# EAGLE board remote_node_schematic (EAGLE 8.3.1)

No outline drawn. Coordinates in mm, seen from the top.
Copper layers (1*16): Top 0.035mm / dielectric 1.5mm / Bottom 0.035mm
Design rules "default": minimum track width 6mil, minimum drill 0.35mm, track to track 6mil, track to pad 6mil, pad to pad 6mil, via to via 6mil, smd to smd 6mil, copper to edge 40mil, drill to drill 6mil, minimum pad ring 10mil, minimum via ring 8mil, stop-mask expansion 4mil, vias tented up to drill 0mil, thermal gap 10mil

## Footprints (pad centres in the part's own frame; a part is rotated, then mirrored left to right if it is on the bottom)
085CS_1AR = smd 2.9 x 2.5: + 3.25,0; - -3.25,0
0207/10 = drill 0.813 octagon: 1 -5.08,0; 2 5.08,0
SOP65P490X110-8N = smd 1.499 x 0.432: 1 -2.184,0.965; 2 -2.184,0.33; 3 -2.184,-0.33; 4 -2.184,-0.965; 5 2.184,-0.965; 6 2.184,-0.33; 7 2.184,0.33; 8 2.184,0.965

## Placement (x,y rotation side)
C1  10u  [085CS_1AR]  -2.54,-401.32 0 top
C2  10u  [085CS_1AR]  -2.54,-410.21 0 top
R1  82k  [0207/10]  0,-340.36 0 top
R2  10k  [0207/10]  0,-354.33 0 top
U1  ADP3333ARMZ-3.3-R7  [SOP65P490X110-8N]  -6.35,-379.73 0 top
U2  ADP3333ARMZ-3.3-R7  [SOP65P490X110-8N]  -6.35,-391.16 0 top

## Library data of the parts
C1 C2 = rcl
R1 R2 = resistor
U1 = ADP3333ARMZ-3.3-R7; AVAILABILITY: Good; DESCRIPTION: PMIC - LDO voltage regulator Analog Devices ADP3333ARMZ-3.3-R7 Positive, fixed MSOP 8; MF: Analog Devices; MP: ADP3333ARMZ-3.3-R7; PACKAGE: MSOP-8 Analog Devices; PRICE: 1.69 USD
U2 = ADP3333ARMZ-3.3-R7; AVAILABILITY: Good; DESCRIPTION: PMIC - LDO voltage regulator Analog Devices ADP3333ARMZ-3.3-R7 Positive, fixed MSOP 8; MF: Analog Devices; MP: ADP3333ARMZ-5-R7; PACKAGE: MSOP-8 Analog Devices; PRICE: 1.69 USD

## Nets
+3V3: C1.+ U1.1
+9V: C2.+ U2.1
+12V: R1.2 U1.2 U1.7 U2.2 U2.7
GND: C1.- C2.- R2.1 U1.3 U2.3
VBATTERY: R1.1 R2.2

## Tracks (layer width: path | path; a pad name or v marks a point on that pad's centre or on a via)
+3V3  (1 unrouted)
+9V  (1 unrouted)
+12V  (4 unrouted)
GND  (4 unrouted)
VBATTERY  (1 unrouted)